# EAGLE board MurataBLE_P (EAGLE 7.5.0)
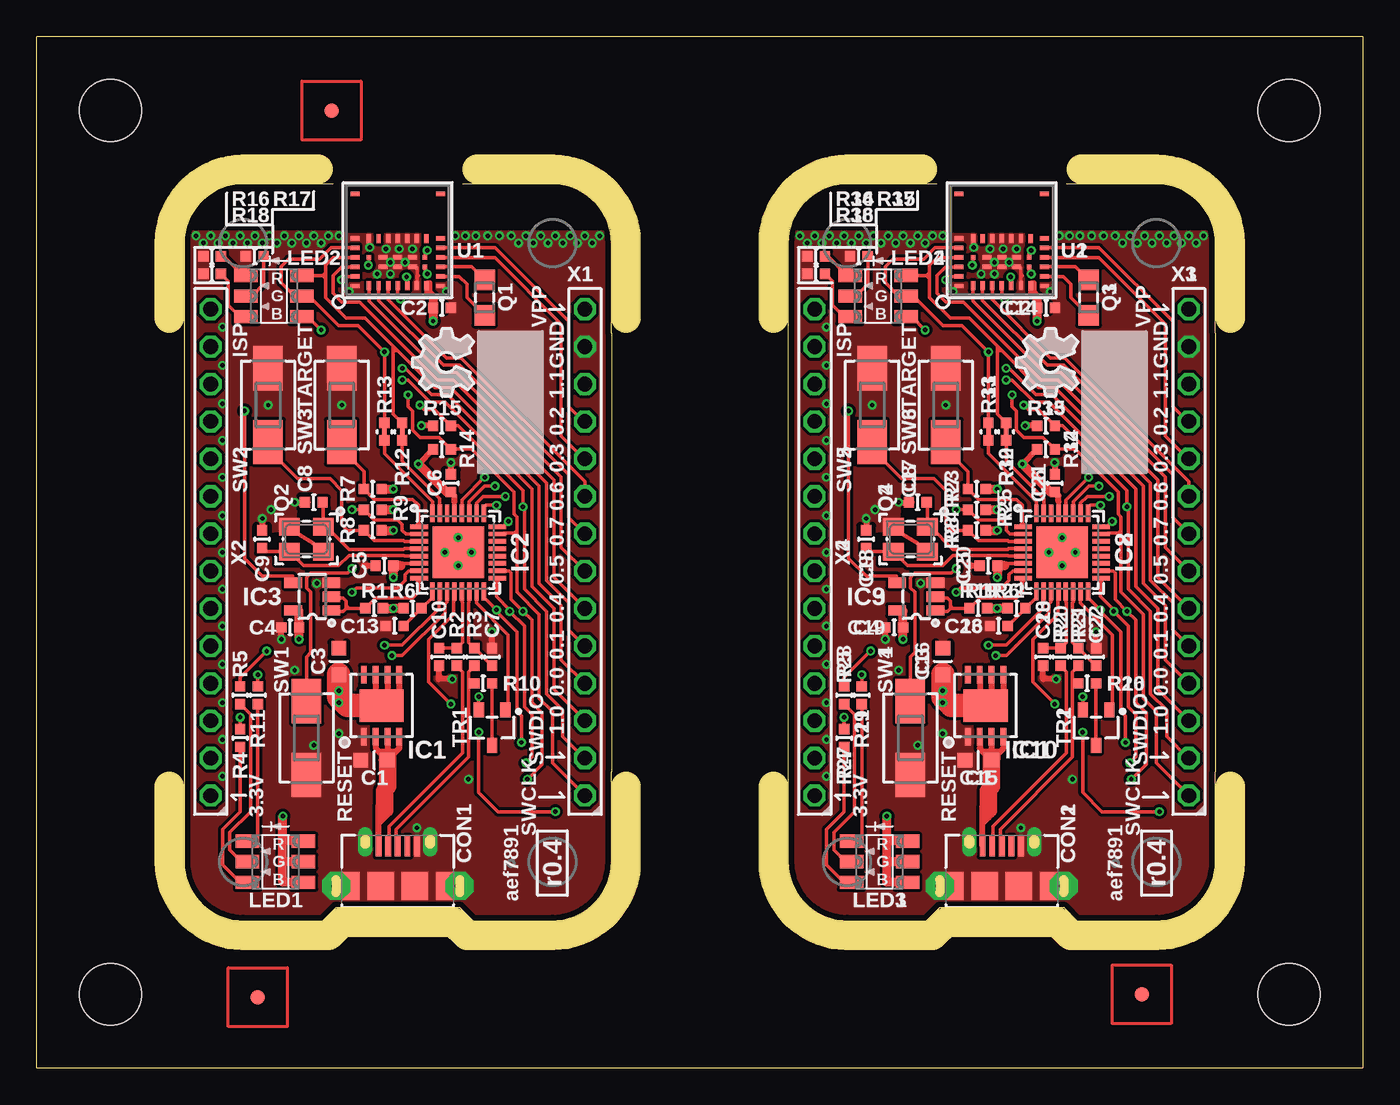
[diagram p0: board, top side]
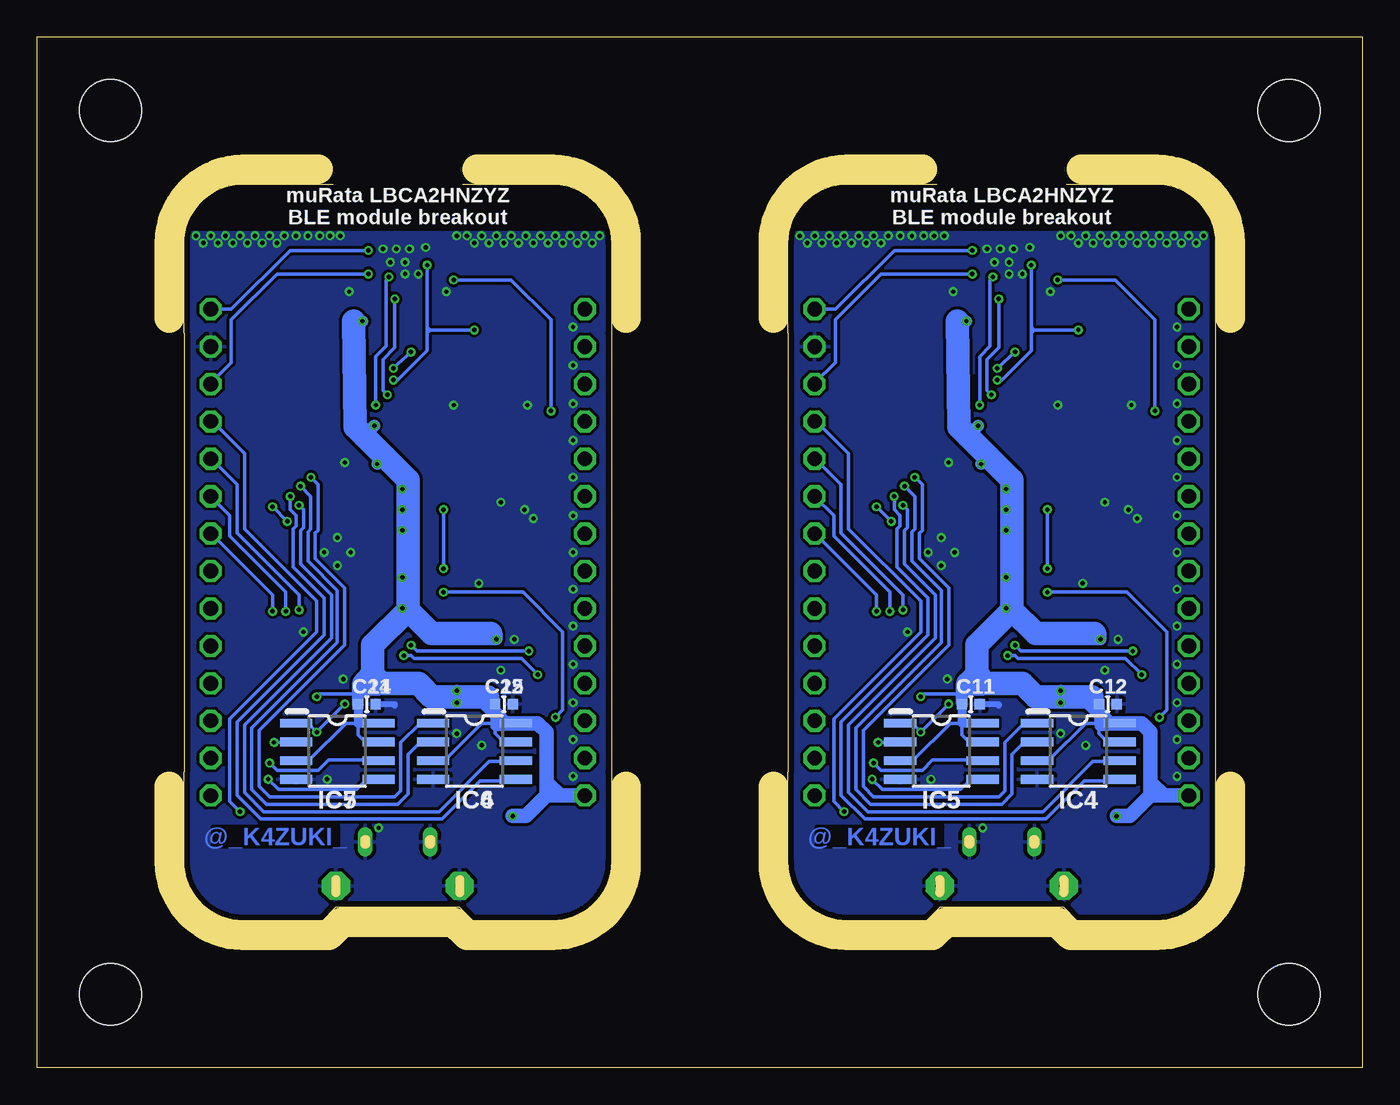
[diagram p1: board, bottom side, seen from below]

Size 90 x 70 mm. Coordinates in mm from the lower left corner, seen from the top.
Outline: 10,49.9 10,20.1
Outline: 39,49.9 39,20.1
Outline: 19.4,10 20.3,10.9 28.7,10.9 29.6,10
Outline: 51,49.9 51,20.1
Outline: 80,49.9 80,20.1
Outline: 60.4,10 61.3,10.9 69.7,10.9 70.6,10
Outline: 0,0 0,70 90,70 90,0 0,0
Copper layers (1*16): Top 0.035mm / dielectric 1.5mm / Bottom 0.035mm
Design rules "default *": minimum track width 0.15mm, minimum drill 0.3mm, track to track 0.15mm, track to pad 0.15mm, pad to pad 0.15mm, via to via 0.15mm, smd to smd 0mil, copper to edge 0.4mm, drill to drill 0.15mm, minimum pad ring 0.15mm, minimum via ring 0.15mm, stop-mask expansion 0.05mm, vias tented up to drill 100mil, thermal gap 10mil
Net classes: 0 default: clearance 0.15 mm
Holes 4.2 mm at 5,65 5,5 85,5 85,65
tRestrict: area 10,57.1 to 21.2,60; area 28.2,57.1 to 39,60; area 16.2,34.2 to 20.4,37.6; area 51,57.1 to 62.2,60; area 69.2,57.1 to 80,60; area 57.2,34.2 to 61.4,37.6; 48 lines
bRestrict: area 10,57.1 to 39,60; area 51,57.1 to 80,60
Milling: 10 lines

## Footprints (pad centres in the part's own frame; a part is rotated, then mirrored left to right if it is on the bottom)
CR_1608 = smd 1 x 1: 1 -0.9,0; 2 0.9,0
C0402 = smd 0.7 x 0.7: 1 -0.6,0; 2 0.6,0
CON_USB_47589-0001MOLEX = smd 0.4 x 1.4: 1 -1.3,4.15; 2 -0.65,4.15; 3 0,4.15; 4 0.65,4.15; 5 1.3,4.15 | drill 0.6 pad 1 long: SHD -2.2,4.45; SHD$1 2.2,4.45 | drill 0.6 pad 1.9 octagon: SHD$2 -4.2,1.45; SHD$3 4.2,1.45 | smd 1.6 x 1.9: SHD$4 -3.4,1.45; SHD$7 3.4,1.45 | smd 1.8 x 1.9: SHD$5 -1.15,1.45; SHD$6 1.15,1.45
DFN80P410X410_8N = smd 0.4 x 1.2: 1 -1.2,-2.1; 2 -0.4,-2.1; 3 0.4,-2.1; 4 1.2,-2.1; 5 1.2,2.1; 6 0.4,2.1; 7 -0.4,2.1; 8 -1.2,2.1 | smd 3 x 2.2: EP 0,0
HVQFN33 = smd 1.2 x 0.3: 1 -2.65,1.75; 2 -2.65,1.25; 3 -2.65,0.75; 4 -2.65,0.25; 5 -2.65,-0.25; 6 -2.65,-0.75; 7 -2.65,-1.25; 8 -2.65,-1.75; 17 2.65,-1.75; 18 2.65,-1.25; 19 2.65,-0.75; 20 2.65,-0.25; 21 2.65,0.25; 22 2.65,0.75; 23 2.65,1.25; 24 2.65,1.75 | smd 0.3 x 1.2: 9 -1.75,-2.65; 10 -1.25,-2.65; 11 -0.75,-2.65; 12 -0.25,-2.65; 13 0.25,-2.65; 14 0.75,-2.65; 15 1.25,-2.65; 16 1.75,-2.65; 25 1.75,2.65; 26 1.25,2.65; 27 0.75,2.65; 28 0.25,2.65; 29 -0.25,2.65; 30 -0.75,2.65; 31 -1.25,2.65; 32 -1.75,2.65 | smd 3.5 x 3.5: EXP 0,0
SOT95P280X145-5N = smd 1.2 x 0.7: 1 -1.3,0.95; 2 -1.3,0; 3 -1.3,-0.95; 4 1.3,-0.95; 5 1.3,0.95
IC_08_1.27_150MIL = smd 0.6 x 2.2: 1 -1.905,-2.8; 2 -0.635,-2.8; 3 0.635,-2.8; 4 1.905,-2.8; 5 1.905,2.8; 6 0.635,2.8; 7 -0.635,2.8 | smd 0.603 x 2.2: 8 -1.905,2.8
LED_3SEG_SMD = smd 1.6 x 0.9: 1 -1.9,1.4; 2 -1.9,0; 3 -1.9,-1.4; 4 1.9,1.4; 5 1.9,0; 6 1.9,-1.4
CR_2125 = smd 1.4 x 1.4: 1 -1.2,0; 2 1.2,0
CLOCK_3225 = smd 1.4 x 1.2: 1 -1.15,-0.85; 2 1.15,-0.85; 3 1.15,0.85; 4 -1.15,0.85
R0402SHORT = smd 0.7 x 0.7: 1 -0.6,0; 3 0.6,0 | smd 0.8 x 0.3: 2 0,0
SW_TACTSW_FSM2JMTR = smd 3 x 2: 1 -2.5,0; 2 2.5,0
FIDUCIAL = smd 1 x 1: TP 0,0
SOT95P300X140-3N = smd 0.7 x 1: 1 -0.9,-1.2; 2 0.9,-1.2; 3 0,1.2
IC_MURATA_LBCA2HNZYZ-711 = smd 0.3 x 0.6: 1 1.55,0.6; 2 2.2,0.6; 3 2.85,0.6; 4 3.5,0.6; 5 4.15,0.6; 6 4.8,0.6; 7 5.45,0.6; 14 5.45,3.8; 15 4.8,3.8; 16 4.15,3.8; 17 3.5,3.8; 18 2.85,3.8; 19 2.2,3.8; 20 1.55,3.8 | smd 0.6 x 0.3: 8 6.4,0.575; 9 6.4,1.225; 10 6.4,1.875; 11 6.4,2.525; 12 6.4,3.175; 13 6.4,3.825; 21 0.6,3.825; 22 0.6,3.175; 23 0.6,2.525; 24 0.6,1.875; 25 0.6,1.225; 26 0.6,0.575; 27 2.5,1.875; 28 3.5,1.875; 29 4.5,1.875; 32 4.5,2.525; 33 3.5,2.525; 34 2.5,2.525; 36 6.4,6.825; 37 0.6,6.825 | smd 0.3 x 0.3: 30 5.35,1.875; 31 5.35,2.525; 35 1.55,2.525
TSW-114-07-F-S = drill 1 pad 1.5 octagon: 1 16.51,0; 2 13.97,0; 3 11.43,0; 4 8.89,0; 5 6.35,0; 6 3.81,0; 7 1.27,0; 8 -1.27,0; 9 -3.81,0; 10 -6.35,0; 11 -8.89,0; 12 -11.43,0; 13 -13.97,0; 14 -16.51,0

## Placement (x,y rotation side)
C1  1u/1608  [CR_1608]  22.9,20.9 180 top
C2  0.1u/1005  [C0402]  27.5,51.6 0 top
C3  1u/1608  [CR_1608]  20.5,27.6 90 top
C4  0.1u/1005  [C0402]  17.2,29.9 180 top
C5  0.1u/1005  [C0402]  23.6,34.1 180 top
C6  0.1u/1005  [C0402]  28.1,39.7 90 top
C7  18p/1005  [C0402]  30.9,27.9 90 top
C8  18p/1005  [C0402]  18.8,38.4 180 top
C9  18p/1005  [C0402]  15.3,35.9 90 top
C10  18p/1005  [C0402]  27.3,27.9 270 top
C11  0.1u/1005  [C0402]  26.6,24.7 0 bottom
C12  0.1u/1005  [C0402]  17.3,24.7 0 bottom
C13  0.1u/1005  [C0402]  24.3,30 180 top
C14  0.1u/1005  [C0402]  68.5,51.6 0 top
C15  1u/1608  [CR_1608]  63.9,20.9 180 top
C16  1u/1608  [CR_1608]  61.5,27.6 90 top
C17  18p/1005  [C0402]  59.8,38.4 180 top
C18  18p/1005  [C0402]  56.3,35.9 90 top
C19  0.1u/1005  [C0402]  58.2,29.9 180 top
C20  0.1u/1005  [C0402]  64.6,34.1 180 top
C21  0.1u/1005  [C0402]  69.1,39.7 90 top
C22  18p/1005  [C0402]  71.9,27.9 90 top
C23  18p/1005  [C0402]  68.3,27.9 270 top
C24  0.1u/1005  [C0402]  67.6,24.7 0 bottom
C25  0.1u/1005  [C0402]  58.3,24.7 0 bottom
C26  0.1u/1005  [C0402]  65.3,30 180 top
CON1  47589-0001  [CON_USB_47589-0001MOLEX]  24.5,10.9 0 top
CON2  47589-0001  [CON_USB_47589-0001MOLEX]  65.5,10.9 0 top
GIT1  aef7891  [GIT-REVISION]  32.2,13.9 90 top
GIT2  aef7891  [GIT-REVISION]  73.2,13.9 90 top
IC1  [DFN80P410X410_8N]  23.4,24.6 0 top
IC2  LPC11U35_QFN33  [HVQFN33]  28.6,35 0 top
IC3  NC7SZ00  [SOT95P280X145-5N]  18.7,32 180 top
IC4  AT25DN512C  [IC_08_1.27_150MIL]  19.3,21.5 270 bottom
IC5  AT25XE011  [IC_08_1.27_150MIL]  28.6,21.5 270 bottom
IC6  AT25DN512C  [IC_08_1.27_150MIL]  60.3,21.5 270 bottom
IC7  AT25XE011  [IC_08_1.27_150MIL]  69.6,21.5 270 bottom
IC8  LPC11U35_QFN33  [HVQFN33]  69.6,35 0 top
IC9  NC7SZ00  [SOT95P280X145-5N]  59.7,32 180 top
IC10  [DFN80P410X410_8N]  64.4,24.6 0 top
ICON1  r0.4  [ICON_REVISION1.2]  35,14 90 top
ICON2  NC  [ICON_OSHW]  27.8,47.9 90 top
ICON3  r0.4  [ICON_REVISION1.2]  76,14 90 top
ICON4  NC  [ICON_OSHW]  68.8,47.9 90 top
LED1  LED_3SEG  [LED_3SEG_SMD]  16.2,14 0 top
LED2  LED_3SEG  [LED_3SEG_SMD]  16.1,52.4 0 top
LED3  LED_3SEG  [LED_3SEG_SMD]  57.2,14 0 top
LED4  LED_3SEG  [LED_3SEG_SMD]  57.1,52.4 0 top
P1  NC  [PCB_CORNER_NH]  35,14 0 top
P2  NC  [PCB_CORNER_NH]  35,56 90 top
P3  NC  [PCB_CORNER_NH]  14,56 180 top
P4  NC  [PCB_CORNER_NH]  14,14 270 top
P5  NC  [PCB_CORNER_NH]  76,14 0 top
P6  NC  [PCB_CORNER_NH]  76,56 90 top
P7  NC  [PCB_CORNER_NH]  55,56 180 top
P8  NC  [PCB_CORNER_NH]  55,14 270 top
Q1  32.768K/2012  [CR_2125]  30.4,52.3 90 top
Q2  12M/3225  [CLOCK_3225]  18.3,35.9 180 top
Q3  32.768K/2012  [CR_2125]  71.4,52.3 90 top
Q4  12M/3225  [CLOCK_3225]  59.3,35.9 180 top
R1  10k/1005  [C0402]  22.9,31.2 180 top
R2  33/1005  [C0402]  28.5,27.9 90 top
R3  33/1005  [C0402]  29.7,27.9 90 top
R4  1k/1005  [C0402]  13.8,22.4 270 top
R5  1k/1005  [C0402]  13.8,25.3 270 top
R6  10k/1005  [C0402]  25.5,31.2 0 top
R7  10k/1005  [C0402]  22.8,39.3 180 top
R8  10k/1005  [C0402]  22.8,36.5 180 top
R9  10k/1005  [C0402]  22.8,37.9 180 top
R10  1.5k/1005  [C0402]  30.3,26.1 180 top
R11  1k/1005  [C0402]  15,25.3 270 top
R12  NC  [R0402SHORT]  24.8,43.2 90 top
R13  NC  [R0402SHORT]  23.6,43.2 90 top
R14  10k/1005  [C0402]  27.5,42 180 top
R15  10k/1005  [C0402]  27.5,43.6 180 top
R16  1k/1005  [C0402]  11.9,55.1 180 top
R17  1k/1005  [C0402]  14.8,55.1 180 top
R18  1k/1005  [C0402]  11.9,53.9 180 top
R19  10k/1005  [C0402]  63.9,31.2 180 top
R20  33/1005  [C0402]  69.5,27.9 90 top
R21  33/1005  [C0402]  70.7,27.9 90 top
R22  10k/1005  [C0402]  66.5,31.2 0 top
R23  10k/1005  [C0402]  63.8,39.3 180 top
R24  10k/1005  [C0402]  63.8,36.5 180 top
R25  10k/1005  [C0402]  63.8,37.9 180 top
R26  1.5k/1005  [C0402]  71.3,26.1 180 top
R27  1k/1005  [C0402]  54.8,22.4 270 top
R28  1k/1005  [C0402]  54.8,25.3 270 top
R29  1k/1005  [C0402]  56,25.3 270 top
R30  NC  [R0402SHORT]  65.8,43.2 90 top
R31  NC  [R0402SHORT]  64.6,43.2 90 top
R32  10k/1005  [C0402]  68.5,42 180 top
R33  10k/1005  [C0402]  68.5,43.6 180 top
R34  1k/1005  [C0402]  52.9,55.1 180 top
R35  1k/1005  [C0402]  55.8,55.1 180 top
R36  1k/1005  [C0402]  52.9,53.9 180 top
SW1  FSM2JMTR  [SW_TACTSW_FSM2JMTR]  18.3,22.4 90 top
SW2  FSM2JMTR  [SW_TACTSW_FSM2JMTR]  15.7,45 270 top
SW3  FSM2JMTR  [SW_TACTSW_FSM2JMTR]  20.7,45 270 top
SW4  FSM2JMTR  [SW_TACTSW_FSM2JMTR]  59.3,22.4 90 top
SW5  FSM2JMTR  [SW_TACTSW_FSM2JMTR]  56.7,45 270 top
SW6  FSM2JMTR  [SW_TACTSW_FSM2JMTR]  61.7,45 270 top
TP100  NC  [FIDUCIAL]  15,4.8 0 top
TP101  NC  [FIDUCIAL]  75,5 0 top
TP102  NC  [FIDUCIAL]  20,65 0 top
TR1  BSS84  [SOT95P300X140-3N]  30.9,23.1 180 top
TR2  BSS84  [SOT95P300X140-3N]  71.9,23.1 180 top
U1  LBCA2HNZYZ  [IC_MURATA_LBCA2HNZYZ-711]  21,52.5 0 top
U2  LBCA2HNZYZ  [IC_MURATA_LBCA2HNZYZ-711]  62,52.5 0 top
X1  TSW-114-02-S-S  [TSW-114-07-F-S]  37.2,35 270 top
X2  TSW-114-02-S-S  [TSW-114-07-F-S]  11.8,35 270 top
X3  TSW-114-02-S-S  [TSW-114-07-F-S]  78.2,35 270 top
X4  TSW-114-02-S-S  [TSW-114-07-F-S]  52.8,35 270 top

## Library data of the parts
C1 C3 C15 C16 = mylib; SEEED: 302010139
C2 C4-C6 C11-C14 C19-C21 C24-C26 = mylib; DIGIKEY: 490-3261-1-ND; SEEED: 302010024
C7-C10 C17 C18 C22 C23 = mylib; DIGIKEY: 490-5858-1-ND; SEEED: 302010016
CON1 CON2 = mylib; DIGIKEY: WM17143CT-ND
GIT1 GIT2 = git-revision; NOT_COMPONENT: YES
IC1 IC10 = mylib; DIGIKEY: 296-32364-1-ND
IC2 IC8 = mylib; DIGIKEY: 568-9586-ND; SEEED: 310010053
IC3 IC9 = mylib; DIGIKEY: NC7SZ00M5XCT-ND
IC4 IC6 = mylib; MOUSER: 988-A25DN512CSSHFGPT (cuttape)
IC5 IC7 = mylib; DIGIKEY: 1265-1137-1-ND
ICON1-ICON4 P1-P8 R12 R13 R30 R31 TP100-TP102 = mylib; NOT_COMPONENT: YES
LED1-LED4 = mylib; MOUSER: 604-APF3236SEEZGQBDC
Q1 Q3 = mylib; DIGIKEY: 1253-1342-1-ND
Q2 Q4 = mylib; DIGIKEY: 1253-1168-1-ND
R1 R6-R9 R14 R15 R19 R22-R25 R32 R33 = mylib; DIGIKEY: P10.0KLCT-ND; SEEED: 301010047
R2 R3 R20 R21 = mylib; DIGIKEY: P33.0LCT-ND; SEEED: 301010609
R4 R5 R11 R16-R18 R27-R29 R34-R36 = mylib; DIGIKEY: P1.00KLCT-ND; SEEED: 301010006
R10 R26 = mylib; DIGIKEY: P1.50KLCT-ND; SEEED: 301010001
SW1-SW6 = mylib; DIGIKEY: 450-2146-1-ND
TR1 TR2 = mylib; AKIZUKI: I-04269/I-04270(reel); DIGIKEY: BSS84CT-ND
U1 U2 = mylib; DIGIKEY: 490-10561-1-ND; MOUSER: 81-LBCA2HNZYZ-711
X1-X4 = mylib; AKIZUKI: C-04397; NOT_COMPONENT: YES

## Nets
3.3V: C2.1 C3.1 C4.1 C5.1 C6.1 C11.1 C12.1 IC1.5 IC1.6 IC1.7 IC1.EP IC2.6 IC2.29 IC3.5 IC4.3 IC4.7 IC4.8 IC5.3 IC5.7 IC5.8 LED1.4 LED1.5 LED1.6 R1.1 R6.1 R7.1 R8.1 R9.1 R14.2 R15.2 TR1.2 U1.7 X2.1
3.3V1: C14.1 C16.1 C19.1 C20.1 C21.1 C24.1 C25.1 IC6.3 IC6.7 IC6.8 IC7.3 IC7.7 IC7.8 IC8.6 IC8.29 IC9.5 IC10.5 IC10.6 IC10.7 IC10.EP LED3.4 LED3.5 LED3.6 R19.1 R22.1 R23.1 R24.1 R25.1 R32.2 R33.2 TR2.2 U2.7 X4.1
580.P0_0: LED2.4 R12.3 U1.23 X1.5
580.P0_1: LED2.5 R13.3 U1.22 X1.4
580.P0_2: IC2.12 IC5.1 U1.12 X1.11
580.P0_3: IC2.16 IC5.2 U1.11 X1.10
580.P0_4: U1.24 X1.6
580.P0_5: U1.1 X1.7
580.P0_6: IC2.17 IC5.6 U1.3 X1.9
580.P0_7: IC2.18 IC5.5 U1.2 X1.8
580.P0_8: U2.1 X3.7
580.P0_9: IC7.6 IC8.17 U2.3 X3.9
580.P0_10: IC7.5 IC8.18 U2.2 X3.8
580.P0_11: IC7.1 IC8.12 U2.12 X3.11
580.P0_12: IC7.2 IC8.16 U2.11 X3.10
580.P0_13: U2.24 X3.6
580.P0_14: LED4.4 R30.3 U2.23 X3.5
580.P0_15: LED4.5 R31.3 U2.22 X3.4
580.P1_0: LED2.6 U1.35 X1.3
580.P1_1: U1.30 X1.12
580.P1_2: LED4.6 U2.35 X3.3
580.P1_3: U2.30 X3.12
!RESET!: IC2.2 R9.2 SW1.2
!RESET!1: IC8.2 R25.2 SW4.2
FB_BL: IC2.1 R7.2 SW3.2
FB_BL1: IC8.1 R23.2 SW6.2
FB_ISP: IC2.3 R8.2 SW2.2
FB_ISP1: IC8.3 R24.2 SW5.2
GND: C1.2 C2.2 C3.2 C4.2 C5.2 C6.2 C7.2 C8.2 C9.2 C10.2 C11.2 C12.2 C13.2 CON1.5 CON1.SHD CON1.SHD$1 CON1.SHD$2 CON1.SHD$3 CON1.SHD$4 CON1.SHD$5 CON1.SHD$6 CON1.SHD$7 IC1.1 IC2.EXP IC3.3 IC4.4 IC5.4 Q2.2 Q2.4 R16.2 R17.2 R18.2 SW1.1 SW2.1 SW3.1 U1.6 U1.8 U1.15 U1.16 U1.17 U1.18 U1.20 U1.21 U1.26 U1.27 U1.28 U1.29 U1.32 U1.33 U1.34 X1.13
GND1: C14.2 C15.2 C16.2 C17.2 C18.2 C19.2 C20.2 C21.2 C22.2 C23.2 C24.2 C25.2 C26.2 CON2.5 CON2.SHD CON2.SHD$1 CON2.SHD$2 CON2.SHD$3 CON2.SHD$4 CON2.SHD$5 CON2.SHD$6 CON2.SHD$7 IC6.4 IC7.4 IC8.EXP IC9.3 IC10.1 Q4.2 Q4.4 R34.2 R35.2 R36.2 SW4.1 SW5.1 SW6.1 U2.6 U2.8 U2.15 U2.16 U2.17 U2.18 U2.20 U2.21 U2.26 U2.27 U2.28 U2.29 U2.32 U2.33 U2.34 X3.13
N$2: Q1.1 U1.9
N$3: Q1.2 U1.10
N$4: C13.1 IC2.9 R6.2
N$5: Q3.1 U2.9
N$6: R10.1 TR1.3
N$7: IC2.15 TR1.1
N$8: IC2.7 R4.1
N$9: IC2.10 R5.1
N$10: IC2.11 R11.1
N$11: LED1.1 R11.2
N$12: LED1.2 R5.2
N$13: LED1.3 R4.2
N$14: LED2.3 R18.1
N$15: LED2.2 R17.1
N$16: LED2.1 R16.1
N$17: Q3.2 U2.10
N$18: C8.1 IC2.4 Q2.1
N$19: C9.1 IC2.5 Q2.3
N$20: C7.1 IC2.14 R3.2
N$21: CON1.3 R3.1 R10.2
N$22: CON1.2 R2.1
N$23: C17.1 IC8.4 Q4.1
N$24: C10.1 IC2.13 R2.2
N$25: C18.1 IC8.5 Q4.3
N$26: CON2.3 R21.1 R26.2
N$27: CON2.2 R20.1
N$28: C22.1 IC8.14 R21.2
N$29: C23.1 IC8.13 R20.2
N$30: C26.1 IC8.9 R22.2
N$31: R26.1 TR2.3
N$32: IC8.15 TR2.1
N$33: IC8.7 R27.1
N$34: IC8.10 R28.1
N$35: IC8.11 R29.1
N$36: LED3.2 R28.2
N$37: LED3.1 R29.2
N$38: LED3.3 R27.2
N$39: LED4.3 R36.1
N$40: LED4.2 R35.1
N$41: LED4.1 R34.1
NSRST: IC2.8 IC3.1 IC3.2 R1.2
NSRST1: IC8.8 IC9.1 IC9.2 R19.2
P0_1: IC6.2 IC8.27
P0_2: IC6.5 IC8.26
P0_3: IC6.6 IC8.25
P0_15: IC2.25 IC4.6
P0_16: IC2.26 IC4.5
P0_32: IC2.27 IC4.2
P1_1: IC6.1 IC8.28
P1_15: IC2.28 IC4.1
RESET: IC3.4 U1.25
RESET1: IC9.4 U2.25
SWCLK: IC2.23 R14.1 U1.4 X1.1
SWCLK1: IC8.23 R32.1 U2.4 X3.1
SWDIO: IC2.24 R15.1 U1.5 X1.2
SWDIO1: IC8.24 R33.1 U2.5 X3.2
TGT_RX: IC2.32 R13.1 R13.2
TGT_RX1: IC8.32 R31.1 R31.2
TGT_TX: IC2.31 R12.1 R12.2
TGT_TX1: IC8.31 R30.1 R30.2
VPP: U1.31 X1.14
VPP2: U2.31 X3.14
VUSB: C1.1 CON1.1 IC1.2 IC1.3 IC1.4
VUSB1: C15.1 CON2.1 IC10.2 IC10.3 IC10.4

## Tracks (layer width: path | path; a pad name or v marks a point on that pad's centre or on a via)
3.3V  (via drill 0.3)
  Top 0.25: IC2.6 24.85,34.25 24.8,34.2 | IC2.29 28.35,38.45 | TR1.2 v30,25.2 | IC3.5 17.75,31.05 17.8,31
  Top 0.3: U1.7 26.45,52.6 26.6,52.6 | 26.6,52.6 26.6,53.3 | 26.6,53.3 26.5,53.3 | 26.6,52.6 26.7,52.6 26.7,53.3 26.6,53.3
  Top 0.4: 24.8,34.2 24.7,34.1 | 28.35,38.45 28.35,38.85 C6.1 | v25.9,41 R14.2 | R15.2 v26.1,43.6 | IC1.7 23,25 IC1.EP 23.8,25 | IC1.6 23.8,25 | IC1.5 24.6,25 23.8,25
  Top 0.6: 26.6,52.6 26.9,52.3 C2.1 v26.9,50.7 | v24.2,33.3 C5.1 24.7,34.1 | v17.8,29.1 C4.1 17.8,31 | C6.1 27.8,39.1 v25.9,41 | R8.1 v24.2,36.5 | R9.1 v24.2,37.9 | R7.1 v24.2,39.3 | R6.1 v24.2,31.2 R1.1 | LED1.6 16.7,12.6 16.7,14 | 16.7,14 16.7,15.4 | 16.7,15.4 v16.7,17.1 | LED1.4 16.7,15.4 | LED1.5 16.7,14
  Top 0.8: v20.5,24.8 20.5,25.2 v20.5,25.6
  Top 1.6: IC1.EP 21.1,24.6 20.5,25.2 | v20.5,25.6 C3.1
  Bottom 0.25: IC5.3 31.4,20.9 30.5,20.9 28,23.4 27.2,23.4 27.2,22.6 26.8,22.2 25.8,22.2 IC5.7 | IC4.7 16.54,22.14 16.6,22.2 17.4,22.2 17.9,22.7 17.9,23.2 | IC4.3 22.1,20.9 21.3,20.9 18.8,23.4 17.9,23.4 | v30,25.2 29.8,25.4 27.2,25.4
  Bottom 0.6: IC5.8 27.2,23.4 C11.1 | IC4.8 | 17.9,23.4 17.9,24.1 C12.1 | C12.1 18.5,24.7 | C12.1 17.9,25.2 18.4,25.2 | 17.7,23.4 17.9,23.4 | 17.9,23.4 17.9,23.2 17.4,23.2
  Bottom 0.8: 23.8,31.2 v24.2,31.2 24.2,30.8 | v24.2,33.3 23.8,33.3 | v24.2,36.5 23.8,36.5 | v24.2,39.3 23.8,39.3 | 23.8,37.9 v24.2,37.9 | 27.5,50.7 v26.9,50.7 | C11.1 27.2,25.4 27.2,25.7 | v25.9,41 25.4,41.5 | v26.1,43.6 26.8,42.9 | 27.2,25.7 26.8,26.1 | 27.2,25.7 27.2,26.1 | 27.2,25.7 25.7,25.7 | v20.5,24.8 20.5,25.2 v20.5,25.6 | 17.8,29.5 18.2,29.5 18.2,29.1 v17.8,29.1 17.8,29.5
  Bottom 1: IC4.8 17.2,23.4 | v16.7,17.1 15.8,17.1 14.4,18.5 | 14.4,18.5 14.4,19.4 | 14.4,19.4 14.4,22.8 15.01,23.41 IC4.8 | 17.2,23.4 17.9,24.1 18.5,24.7 18.7,24.9 | 17.2,23.4 17.7,23.4 | X2.1 13.5,18.5 | 13.5,18.5 14.4,18.5 | 14.4,19.4 13.5,18.5
  Bottom 1.6: 23.8,31.1 22.2,29.5 18.2,29.5 | 23.8,31.1 23.8,31.2 23.8,33.3 23.8,36.5 23.8,37.9 23.8,39.3 23.8,39.9 25.4,41.5 26.8,42.9 27.4,43.5 27.5,50.7 | 23.8,31.1 26.2,28.7 26.2,26.7 | 26.2,26.7 26.8,26.1 25.6,26.1 | 26.2,26.7 25.6,26.1 | 25.6,26.1 23.1,26.1 22.2,25.2 20.5,25.2 18.4,25.2
3.3V1  (via drill 0.3)
  Top 0.25: IC8.6 65.85,34.25 65.8,34.2 | IC8.29 69.35,38.45 | TR2.2 v71,25.2 | IC9.5 58.75,31.05 58.8,31
  Top 0.3: U2.7 67.45,52.6 67.6,52.6 | 67.6,52.6 67.6,53.3 | 67.6,53.3 67.5,53.3 | 67.6,52.6 67.7,52.6 67.7,53.3 67.6,53.3
  Top 0.4: 65.8,34.2 65.7,34.1 | 69.35,38.45 69.35,38.85 C21.1 | v66.9,41 R32.2 | R33.2 v67.1,43.6 | IC10.7 64,25 IC10.EP 64.8,25 | IC10.6 64.8,25 | IC10.5 65.6,25 64.8,25
  Top 0.6: 67.6,52.6 67.9,52.3 C14.1 v67.9,50.7 | v65.2,33.3 C20.1 65.7,34.1 | v58.8,29.1 C19.1 58.8,31 | C21.1 68.8,39.1 v66.9,41 | R24.1 v65.2,36.5 | R25.1 v65.2,37.9 | R23.1 v65.2,39.3 | R22.1 v65.2,31.2 R19.1 | LED3.6 57.7,12.6 57.7,14 | 57.7,14 57.7,15.4 | 57.7,15.4 v57.7,17.1 | LED3.4 57.7,15.4 | LED3.5 57.7,14
  Top 0.8: v61.5,24.8 61.5,25.2 v61.5,25.6
  Top 1.6: IC10.EP 62.1,24.6 61.5,25.2 | v61.5,25.6 C16.1
  Bottom 0.25: IC7.3 72.4,20.9 71.5,20.9 69,23.4 68.2,23.4 68.2,22.6 67.8,22.2 66.8,22.2 IC7.7 | IC6.7 57.53,22.14 57.6,22.2 58.4,22.2 58.9,22.7 58.9,23.2 | IC6.3 63.1,20.9 62.3,20.9 59.8,23.4 58.9,23.4 | v71,25.2 70.8,25.4 68.2,25.4
  Bottom 0.6: IC7.8 68.2,23.4 C24.1 | IC6.8 | 58.9,23.4 58.9,24.1 C25.1 | C25.1 59.5,24.7 | C25.1 58.9,25.2 59.4,25.2 | 58.7,23.4 58.9,23.4 | 58.9,23.4 58.9,23.2 58.4,23.2
  Bottom 0.8: 64.8,31.2 v65.2,31.2 65.2,30.8 | v65.2,33.3 64.8,33.3 | v65.2,36.5 64.8,36.5 | v65.2,39.3 64.8,39.3 | 64.8,37.9 v65.2,37.9 | 68.5,50.7 v67.9,50.7 | C24.1 68.2,25.4 68.2,25.7 | v66.9,41 66.4,41.5 | v67.1,43.6 67.8,42.9 | 68.2,25.7 67.8,26.1 | 68.2,25.7 68.2,26.1 | 68.2,25.7 66.7,25.7 | v61.5,24.8 61.5,25.2 v61.5,25.6 | 58.8,29.5 59.2,29.5 59.2,29.1 v58.8,29.1 58.8,29.5
  Bottom 1: IC6.8 58.2,23.4 | v57.7,17.1 56.8,17.1 55.4,18.5 | 55.4,18.5 55.4,19.4 | 55.4,19.4 55.4,22.8 56.01,23.41 IC6.8 | 58.2,23.4 58.9,24.1 59.5,24.7 59.7,24.9 | 58.2,23.4 58.7,23.4 | X4.1 54.5,18.5 | 54.5,18.5 55.4,18.5 | 55.4,19.4 54.5,18.5
  Bottom 1.6: 64.8,31.1 63.2,29.5 59.2,29.5 | 64.8,31.1 64.8,31.2 64.8,33.3 64.8,36.5 64.8,37.9 64.8,39.3 64.8,39.9 66.4,41.5 67.8,42.9 68.4,43.5 68.5,50.7 | 64.8,31.1 67.2,28.7 67.2,26.7 | 67.2,26.7 67.8,26.1 66.6,26.1 | 67.2,26.7 66.6,26.1 | 66.6,26.1 64.1,26.1 63.2,25.2 61.5,25.2 59.4,25.2
580.P0_0
  Top 0.25: 19.6,53.6 19.6,52.3 21,50.9 22.3,50.9 24.2,49 | 24.2,48.7 24.2,49 | 24.5,48.7 24.2,49 | 24.2,48.7 24.3,48.7 | 24.3,48.7 24.5,48.7 | 24.5,48.7 27,46.2 28.1,46.2 34.6,39.7 34.6,33.1 36.1,31.6 36.1,29.75 X1.5 | U1.23 20.12,55.02 19.6,54.5 19.6,54 | 24.2,48.6 24.2,44.4 R12.3 | 24.2,48.6 24.2,48.7 | 24.2,48.6 24.3,48.7 | LED2.4 19.4,53.8 | 19.4,53.8 19.6,53.6 | 19.4,53.8 19.6,54 | 19.6,54 19.6,53.6
580.P0_1  (via drill 0.3)
  Top 0.25: v24.8,47.5 25,47.5 26.8,45.7 27.9,45.7 34.1,39.5 34.1,32.9 35.6,31.4 35.6,27.71 X1.4 | U1.22 19.98,55.67 19.2,54.9 17.1,54.9 16.6,54.4 16.6,53.3 17.5,52.4 LED2.5 18.5,52.4 20.5,50.4 21.8,50.4 v23.6,48.6 R13.3
  Bottom 0.25: v23.6,48.6 v24.8,47.5
580.P0_2  (via drill 0.3)
  Top 0.25: U1.12 27.48,55.67 27.5,55.7 31.1,55.7 36.1,50.7 36.1,44.9 37.11,43.89 X1.11 | IC2.12 28.35,31.75 28.3,31.7 28.3,30.8 26.6,29.1 26.6,26.2 v28.1,24.7 | v35.2,17.4 31.3,17.4 30,18.7 v30,22.8
  Bottom 0.25: IC5.1 30.6,23.4 v30,22.8 v28.1,24.7 | v35.2,17.4 35.9,18.1 35.9,23.7 30,29.6 30,31.7 34.9,36.6 34.9,41.7 37.1,43.9 X1.11
580.P0_3  (via drill 0.3)
  Top 0.25: X1.10 37.15,41.35 35.6,42.9 35.6,50.5 31.1,55 27.5,55 27.48,55.02 U1.11 | IC2.16 30.35,31.95 v31.2,31.1 31.2,31 32.6,29.6 32.6,24.2 32.9,23.9 v32.9,22.1
  Bottom 0.25: IC5.2 31.46,22.14 31.5,22.1 v32.9,22.1 | X1.10 37.2,41.4 35.4,39.6 35.4,36.3 31.2,32.1 v31.2,31.1
580.P0_4
  Top 0.25: X1.6 35.1,33.29 35.1,39.9 28.3,46.7 27.2,46.7 21.9,52 20.7,52 20.1,52.6 20.1,53.8 20.68,54.38 U1.24
580.P0_5
  Top 0.25: U1.1 22.55,52.05 27.4,47.2 28.5,47.2 35.6,40.1 35.6,35.33 X1.7
580.P0_6  (via drill 0.3)
  Top 0.25: U1.3 23.85,52.15 27.8,48.2 28.8,48.2 37.2,39.8 X1.9 | IC2.17 31.2,33.2 31.2,33 | 31.2,33 31.2,32 32.1,31.1 v32.1,31 33.1,30 33.1,24.5 33.6,24 33.6,21.1 v33.2,20.7 | 31.2,33 31,33.2 | 31.2,33 31.4,33.2
  Bottom 0.25: IC5.6 25.8,20.9 29.2,20.9 29.9,20.2 32.7,20.2 v33.2,20.7 | X1.9 35.9,37.5 35.9,36.1 32.1,32.3 v32.1,31
580.P0_7  (via drill 0.3)
  Top 0.25: U1.2 23.2,52.1 27.6,47.7 28.7,47.7 36.1,40.3 36.1,37.37 X1.8 | IC2.18 32.05,33.75 32.2,33.6 32.2,31.8 v33,31 33.6,30.4 33.6,24.8 34.3,24.1 34.3,20.6 v33.3,19.6
  Bottom 0.25: v33.3,19.6 32.6,18.9 27.3,18.9 26.6,19.6 25.9,19.6 25.89,19.59 IC5.5 | X1.8 37.13,36.2 37.1,36.2 33,32.1 v33,31
580.P0_8
  Top 0.25: U2.1 63.55,52.05 68.4,47.2 69.5,47.2 76.6,40.1 76.6,35.33 X3.7
580.P0_9  (via drill 0.3)
  Top 0.25: U2.3 64.85,52.15 68.8,48.2 69.8,48.2 78.2,39.8 X3.9 | IC8.17 72.2,33.2 72.2,33 | 72.2,33 72.2,32 73.1,31.1 v73.1,31 74.1,30 74.1,24.5 74.6,24 74.6,21.1 v74.2,20.7 | 72.2,33 72,33.2 | 72.2,33 72.4,33.2
  Bottom 0.25: IC7.6 66.8,20.9 70.2,20.9 70.9,20.2 73.7,20.2 v74.2,20.7 | X3.9 76.9,37.5 76.9,36.1 73.1,32.3 v73.1,31
580.P0_10  (via drill 0.3)
  Top 0.25: U2.2 64.2,52.1 68.6,47.7 69.7,47.7 77.1,40.3 77.1,37.37 X3.8 | IC8.18 73.05,33.75 73.2,33.6 73.2,31.8 v74,31 74.6,30.4 74.6,24.8 75.3,24.1 75.3,20.6 v74.3,19.6
  Bottom 0.25: v74.3,19.6 73.6,18.9 68.3,18.9 67.6,19.6 66.9,19.6 66.89,19.59 IC7.5 | X3.8 78.13,36.2 78.1,36.2 74,32.1 v74,31
580.P0_11  (via drill 0.3)
  Top 0.25: U2.12 68.47,55.67 68.5,55.7 72.1,55.7 77.1,50.7 77.1,44.9 78.11,43.89 X3.11 | IC8.12 69.35,31.75 69.3,31.7 69.3,30.8 67.6,29.1 67.6,26.2 v69.1,24.7 | v76.2,17.4 72.3,17.4 71,18.7 v71,22.8
  Bottom 0.25: IC7.1 71.6,23.4 v71,22.8 v69.1,24.7 | v76.2,17.4 76.9,18.1 76.9,23.7 71,29.6 71,31.7 75.9,36.6 75.9,41.7 78.1,43.9 X3.11
580.P0_12  (via drill 0.3)
  Top 0.25: X3.10 78.15,41.35 76.6,42.9 76.6,50.5 72.1,55 68.5,55 68.47,55.02 U2.11 | IC8.16 71.35,31.95 v72.2,31.1 72.2,31 73.6,29.6 73.6,24.2 73.9,23.9 v73.9,22.1
  Bottom 0.25: IC7.2 72.47,22.14 72.5,22.1 v73.9,22.1 | X3.10 78.2,41.4 76.4,39.6 76.4,36.3 72.2,32.1 v72.2,31.1
580.P0_13
  Top 0.25: X3.6 76.1,33.29 76.1,39.9 69.3,46.7 68.2,46.7 62.9,52 61.7,52 61.1,52.6 61.1,53.8 61.67,54.38 U2.24
580.P0_14
  Top 0.25: 60.6,53.6 60.6,52.3 62,50.9 63.3,50.9 65.2,49 | 65.2,48.7 65.2,49 | 65.5,48.7 65.2,49 | 65.2,48.7 65.3,48.7 | 65.3,48.7 65.5,48.7 | 65.5,48.7 68,46.2 69.1,46.2 75.6,39.7 75.6,33.1 77.1,31.6 77.1,29.75 X3.5 | U2.23 61.12,55.02 60.6,54.5 60.6,54 | 65.2,48.6 65.2,44.4 R30.3 | 65.2,48.6 65.2,48.7 | 65.2,48.6 65.3,48.7 | LED4.4 60.4,53.8 | 60.4,53.8 60.6,53.6 | 60.4,53.8 60.6,54 | 60.6,54 60.6,53.6
580.P0_15  (via drill 0.3)
  Top 0.25: v65.8,47.5 66,47.5 67.8,45.7 68.9,45.7 75.1,39.5 75.1,32.9 76.6,31.4 76.6,27.71 X3.4 | U2.22 60.98,55.67 60.2,54.9 58.1,54.9 57.6,54.4 57.6,53.3 58.5,52.4 LED4.5 59.5,52.4 61.5,50.4 62.8,50.4 v64.6,48.6 R31.3
  Bottom 0.25: v64.6,48.6 v65.8,47.5
580.P1_0  (via drill 0.3)
  Top 0.25: U1.35 22.55,54.55 v22.5,54.5 | v24.8,46.7 25.2,46.7 26.7,45.2 27.7,45.2 33.6,39.3 33.6,32.7 35.1,31.2 35.1,25.7 37.2,23.6 X1.3 | LED2.6 18.4,51 v19.3,50.1
  Bottom 0.25: v22.5,54.5 22.5,50.3 | 22.5,50.3 22.5,49.9 | 22.5,49.9 22.5,48.7 24.5,46.7 v24.8,46.7 | v19.3,50.1 22.3,50.1 | 22.3,50.1 22.5,49.9 | 22.3,50.1 22.5,50.3
580.P1_1  (via drill 0.3)
  Top 0.25: U1.30 26.35,54.05 v26.5,53.9
  Bottom 0.25: X1.12 37.2,46.5 35.8,47.9 35.8,50.8 32.7,53.9 v26.5,53.9
580.P1_2  (via drill 0.3)
  Top 0.25: U2.35 63.55,54.55 v63.5,54.5 | v65.8,46.7 66.2,46.7 67.7,45.2 68.7,45.2 74.6,39.3 74.6,32.7 76.1,31.2 76.1,25.7 78.2,23.6 X3.3 | LED4.6 59.4,51 v60.3,50.1
  Bottom 0.25: v63.5,54.5 63.5,50.3 | 63.5,50.3 63.5,49.9 | 63.5,49.9 63.5,48.7 65.5,46.7 v65.8,46.7 | v60.3,50.1 63.3,50.1 | 63.3,50.1 63.5,49.9 | 63.3,50.1 63.5,50.3
580.P1_3  (via drill 0.3)
  Top 0.25: U2.30 67.35,54.05 v67.5,53.9
  Bottom 0.25: X3.12 78.2,46.5 76.8,47.9 76.8,50.8 73.7,53.9 v67.5,53.9
!RESET!  (via drill 0.3)
  Top 0.25: IC2.2 25.05,36.25 24.8,36.5 24.8,36.9 24.5,37.2 22.9,37.2 R9.2 v21.4,37.9 | SW1.2 18.3,27.9 18.6,28.2 18.6,32.3 18.3,32.6 18.3,33.3 18.6,33.6 21.1,33.6 v21.4,33.9
  Bottom 0.25: v21.4,37.9 v21.4,33.9
!RESET!1  (via drill 0.3)
  Top 0.25: IC8.2 66.05,36.25 65.8,36.5 65.8,36.9 65.5,37.2 63.9,37.2 R25.2 v62.4,37.9 | SW4.2 59.3,27.9 59.6,28.2 59.6,32.3 59.3,32.6 59.3,33.3 59.6,33.6 62.1,33.6 v62.4,33.9
  Bottom 0.25: v62.4,37.9 v62.4,33.9
FB_BL
  Top 0.25: 25.9,37 25.9,38.2 25.5,38.6 22.9,38.6 R7.2 22.2,40.5 20.7,42 SW3.2 | 25.9,37 25.9,36.8 IC2.1 | 25.9,37 25.7,36.8 | 25.9,37 26.1,36.8
FB_BL1
  Top 0.25: 66.9,37 66.9,38.2 66.5,38.6 63.9,38.6 R23.2 63.2,40.5 61.7,42 SW6.2 | 66.9,37 66.9,36.8 IC8.1 | 66.9,37 66.7,36.8 | 66.9,37 67.1,36.8
FB_ISP
  Top 0.25: SW2.2 15.7,42 17.7,40 19.9,40 20.7,39.2 20.7,36.9 21.1,36.5 R8.2 22.9,35.8 24.9,35.8 24.95,35.75 IC2.3
FB_ISP1
  Top 0.25: SW5.2 56.7,42 58.7,40 60.9,40 61.7,39.2 61.7,36.9 62.1,36.5 R24.2 63.9,35.8 65.9,35.8 65.95,35.75 IC8.3
GND  (via drill 0.3, 0.3 pad 0.45)
  Top 0.25: Q2.4 19.35,35.05 18.8,35.6 17.8,36.2 17.25,36.75 Q2.2 | U1.6 25.8,54.33 25.5,54.33 | 25.8,53.7 25.9,53.8 | v29.5,35 IC2.EXP
  Top 0.4: v15.3,37.3 C9.2 | v17.5,38.4 18.4,38.4 | v28.1,41.1 C6.2 | 22.2,34.1 C5.2 | C7.2 v30.9,29.6 | v28.2,26.4 27.3,26.4 C10.2
  Top 0.406: v16.6,29.1 C4.2
  Bottom 0.4: C11.2 24.7,24.7 24.7,24.6
  other vias: 21.2,52.7 22.6,55.7 24.6,55.6 27.8,52.7 25.5,55.6 23.1,53.9 23.7,55.6 15.9,37.9 18.8,56.5 16.8,56.5 31.4,56.5 32.2,56.5 33.2,56.5 17.8,56.5 17.3,56 18.3,56 32.7,56 24,54.7 25,54.7 24,53.9 27.7,35 28.6,34.1 28.6,36 15.7,45 20.7,45 29.3,19.6 20.5,22.7 19,32.9 17.5,27 18.8,21.9 16.3,56 15.8,56.5 15.3,56 14.8,56.5 14.3,56 13.8,56.5 13.3,56 12.8,56.5 12.3,56 11.8,56.5 11.3,56 10.8,56.5 33.7,56 34.2,56.5 34.7,56 35.2,56.5 35.7,56 36.2,56.5 36.7,56 37.2,56.5 37.7,56 38.2,56.5 19.3,56 19.8,56.5 20.5,56.5 30.6,56.5 29.8,56.5 29.1,56.5 28.4,56.5 12.6,50.3 12.6,47.7 12.6,45.1 12.6,42.6 12.6,40.1 12.6,37.5 12.6,35 12.6,32.5 12.6,30 12.6,27.4 12.6,24.8 12.6,22.3 12.6,19.8 25.8,16.3
  pour Top (isolate 0.2, no thermals): 10,10 10,60 39,60 39,10
  pour Bottom (isolate 0.2): 10,10 10,60 39,60 39,10
GND1  (via drill 0.3, 0.3 pad 0.45)
  Top 0.25: Q4.4 60.35,35.05 59.8,35.6 58.8,36.2 58.25,36.75 Q4.2 | U2.6 66.8,54.33 66.5,54.33 | 66.8,53.7 66.9,53.8 | v70.5,35 IC8.EXP
  Top 0.4: v56.3,37.3 C18.2 | v58.5,38.4 59.4,38.4 | v69.1,41.1 C21.2 | 63.2,34.1 C20.2 | C22.2 v71.9,29.6 | v69.2,26.4 68.3,26.4 C23.2
  Top 0.406: v57.6,29.1 C19.2
  Bottom 0.4: C24.2 65.7,24.7 65.7,24.6
  other vias: 62.2,52.7 63.6,55.7 65.6,55.6 68.8,52.7 66.5,55.6 64.1,53.9 64.7,55.6 56.9,37.9 59.8,56.5 57.8,56.5 72.4,56.5 73.2,56.5 74.2,56.5 58.8,56.5 58.3,56 59.3,56 73.7,56 65,54.7 66,54.7 65,53.9 68.7,35 69.6,34.1 69.6,36 56.7,45 61.7,45 70.3,19.6 61.5,22.7 60,32.9 58.5,27 59.8,21.9 57.3,56 56.8,56.5 56.3,56 55.8,56.5 55.3,56 54.8,56.5 54.3,56 53.8,56.5 53.3,56 52.8,56.5 52.3,56 51.8,56.5 74.7,56 75.2,56.5 75.7,56 76.2,56.5 76.7,56 77.2,56.5 77.7,56 78.2,56.5 78.7,56 79.2,56.5 60.3,56 60.8,56.5 61.5,56.5 71.6,56.5 70.8,56.5 70.1,56.5 69.4,56.5 53.6,50.3 53.6,47.7 53.6,45.1 53.6,42.6 53.6,40.1 53.6,37.5 53.6,35 53.6,32.5 53.6,30 53.6,27.4 53.6,24.8 53.6,22.3 53.6,19.8 66.8,16.3
  pour Top (isolate 0.2, no thermals): 51,10 51,60 80,60 80,10
  pour Bottom (isolate 0.2): 51,10 51,60 80,60 80,10
N$2
  Top 0.25: U1.9 28.68,53.73 29.2,53.2 29.2,52.3 Q1.1
N$3
  Top 0.25: U1.10 27.48,54.38 27.5,54.4 29.5,54.4 Q1.2
N$4
  Top 0.25: IC2.9 26.85,31.95 R6.2 C13.1
N$5
  Top 0.25: U2.9 69.67,53.73 70.2,53.2 70.2,52.3 Q3.1
N$6
  Top 0.25: TR1.3 R10.1
N$7
  Top 0.25: IC2.15 29.85,31.55 32,29.4 32,24.5 TR1.1
N$8  (via drill 0.3)
  Top 0.25: IC2.7 25.25,33.75 25,33.5 25,33.1 24.5,32.6 21.7,32.6 v21.4,32.3 | R4.1 v13.8,23.8
  Bottom 0.25: v13.8,23.8 13.3,24.3 13.3,29.6 16,32.3 v21.4,32.3
N$9  (via drill 0.3)
  Top 0.25: IC2.10 27.35,31.85 27.3,31.8 27.3,31.2 24.8,28.7 v23.6,28.7 | v15.6,28.3 13.8,26.5 R5.1
  Bottom 0.25: v15.6,28.3 23.2,28.3 v23.6,28.7
N$10  (via drill 0.3)
  Top 0.25: IC2.11 27.85,31.65 27.7,31.5 27.7,30.9 24.8,28 v24.1,28 | R11.1 v15,26.7
  Bottom 0.25: v24.1,28 23.6,28 23.4,27.8 16.1,27.8 v15,26.7
N$11
  Top 0.25: LED1.1 14.6,15.4 15,15.8 R11.2
N$12
  Top 0.25: LED1.2 13.9,14 13.1,14.8 13.1,16 14.5,17.4 14.5,24 R5.2
N$13
  Top 0.25: LED1.3 13.8,12.6 12.6,13.8 12.6,16.2 13.8,17.4 R4.2
N$14
  Top 0.25: LED2.3 13.8,51 13,51.8 13,53.4 R18.1
N$15
  Top 0.25: LED2.2 14.6,52.4 15.4,53.2 R17.1
N$16
  Top 0.25: R16.1 12.7,55.1 14,53.8 LED2.1
N$17
  Top 0.25: U2.10 68.47,54.38 68.5,54.4 70.5,54.4 Q3.2
N$18
  Top 0.25: C8.1 19.45,38.35 Q2.1 19.65,36.75 21.2,35.2 24.9,35.2 24.95,35.25 IC2.4
N$19
  Top 0.25: C9.1 15.55,35.05 Q2.3 18.1,34.1 20.5,34.1 21.2,34.8 24.9,34.8 24.95,34.75 IC2.5
N$20
  Top 0.25: IC2.14 29.35,31.65 29.3,31.6 29.3,28.9 R3.2 C7.1
N$21
  Top 0.25: R3.1 29.3,26.9 29.3,26.1 | 29.3,26.1 29.3,21.1 24.4,16.2 24.4,15.6 24.5,15.5 CON1.3 | R10.2 29.3,26.1
N$22
  Top 0.25: CON1.2 23.85,15.55 23.9,15.6 23.9,16.4 28.9,21.4 28.9,26.9 R2.1
N$23
  Top 0.25: C17.1 60.45,38.35 Q4.1 60.65,36.75 62.2,35.2 65.9,35.2 65.95,35.25 IC8.4
N$24
  Top 0.25: IC2.13 28.85,31.65 28.9,31.6 28.9,28.9 R2.2 C10.1
N$25
  Top 0.25: C18.1 56.55,35.05 Q4.3 59.1,34.1 61.5,34.1 62.2,34.8 65.9,34.8 65.95,34.75 IC8.5
N$26
  Top 0.25: R21.1 70.3,26.9 70.3,26.1 | 70.3,26.1 70.3,21.1 65.4,16.2 65.4,15.6 65.5,15.5 CON2.3 | R26.2 70.3,26.1
N$27
  Top 0.25: CON2.2 64.85,15.55 64.9,15.6 64.9,16.4 69.9,21.4 69.9,26.9 R20.1
N$28
  Top 0.25: IC8.14 70.35,31.65 70.3,31.6 70.3,28.9 R21.2 C22.1
N$29
  Top 0.25: IC8.13 69.85,31.65 69.9,31.6 69.9,28.9 R20.2 C23.1
N$30
  Top 0.25: IC8.9 67.85,31.95 R22.2 C26.1
N$31
  Top 0.25: TR2.3 R26.1
N$32
  Top 0.25: IC8.15 70.85,31.55 73,29.4 73,24.5 TR2.1
N$33  (via drill 0.3)
  Top 0.25: IC8.7 66.25,33.75 66,33.5 66,33.1 65.5,32.6 62.7,32.6 v62.4,32.3 | R27.1 v54.8,23.8
  Bottom 0.25: v54.8,23.8 54.3,24.3 54.3,29.6 57,32.3 v62.4,32.3
N$34  (via drill 0.3)
  Top 0.25: IC8.10 68.35,31.85 68.3,31.8 68.3,31.2 65.8,28.7 v64.6,28.7 | v56.6,28.3 54.8,26.5 R28.1
  Bottom 0.25: v56.6,28.3 64.2,28.3 v64.6,28.7
N$35  (via drill 0.3)
  Top 0.25: IC8.11 68.85,31.65 68.7,31.5 68.7,30.9 65.8,28 v65.1,28 | R29.1 v56,26.7
  Bottom 0.25: v65.1,28 64.6,28 64.4,27.8 57.1,27.8 v56,26.7
N$36
  Top 0.25: LED3.2 54.9,14 54.1,14.8 54.1,16 55.5,17.4 55.5,24 R28.2
N$37
  Top 0.25: LED3.1 55.6,15.4 56,15.8 R29.2
N$38
  Top 0.25: LED3.3 54.8,12.6 53.6,13.8 53.6,16.2 54.8,17.4 R27.2
N$39
  Top 0.25: LED4.3 54.8,51 54,51.8 54,53.4 R36.1
N$40
  Top 0.25: LED4.2 55.6,52.4 56.4,53.2 R35.1
N$41
  Top 0.25: R34.1 53.7,55.1 55,53.8 LED4.1
NSRST
  Top 0.25: IC2.8 25.9,33.2 25.9,33 | 25.9,33 25.9,32.3 25.5,31.9 23,31.9 R1.2 21.2,31.2 | 25.9,33 25.7,33.2 | 25.9,33 26.1,33.2 | IC3.2 20,31.9 20.8,31.9 21,31.7 21,31.4 | IC3.1 20,31 20.8,31 21,31.2 | 21,31.4 21,31.2 | 21,31.2 21.2,31.2 | 21,31.4 21.2,31.2
NSRST1
  Top 0.25: IC8.8 66.9,33.2 66.9,33 | 66.9,33 66.9,32.3 66.5,31.9 64,31.9 R19.2 62.2,31.2 | 66.9,33 66.7,33.2 | 66.9,33 67.1,33.2 | IC9.2 61,31.9 61.8,31.9 62,31.7 62,31.4 | IC9.1 61,31 61.8,31 62,31.2 | 62,31.4 62,31.2 | 62,31.2 62.2,31.2 | 62,31.4 62.2,31.2
P0_1  (via drill 0.3)
  Top 0.25: IC8.27 70.35,38.45 71.4,39.5 v72.1,39.5
  Bottom 0.25: IC6.2 63.97,22.14 64.8,21.3 64.8,18.6 65.5,17.9 74.4,17.9 75.4,18.9 75.4,23.1 69.6,28.9 69.6,32.4 71.6,34.4 71.6,36.4 71.4,36.6 71.4,38.8 v72.1,39.5
P0_2  (via drill 0.3)
  Top 0.25: IC8.26 70.85,38.35 71.3,38.8 v72.8,38.8
  Bottom 0.25: IC6.5 57.5,19.5 59.9,19.5 62.5,16.9 74.8,16.9 76.4,18.5 76.4,23.5 70.5,29.4 70.5,31.9 72.6,34 72.6,36.6 72.4,36.8 72.4,37.5 72.8,37.9 v72.8,38.8
P0_3  (via drill 0.3)
  Top 0.25: IC8.25 71.4,37.7 71.4,38.1 71.5,38.2 v72.2,38.2
  Bottom 0.25: IC6.6 57.5,20.8 59.3,20.8 62.7,17.4 74.6,17.4 75.9,18.7 75.9,23.3 70,29.2 70,32.1 72.1,34.2 72.1,36.5 71.9,36.7 71.9,37.9 v72.2,38.2
P0_15  (via drill 0.3)
  Top 0.25: IC2.25 30.4,37.7 30.4,38.1 30.5,38.2 v31.2,38.2
  Bottom 0.25: IC4.6 16.5,20.8 18.3,20.8 21.7,17.4 33.6,17.4 34.9,18.7 34.9,23.3 29,29.2 29,32.1 31.1,34.2 31.1,36.5 30.9,36.7 30.9,37.9 v31.2,38.2
P0_16  (via drill 0.3)
  Top 0.25: IC2.26 29.85,38.35 30.3,38.8 v31.8,38.8
  Bottom 0.25: IC4.5 16.5,19.5 18.9,19.5 21.5,16.9 33.8,16.9 35.4,18.5 35.4,23.5 29.5,29.4 29.5,31.9 31.6,34 31.6,36.6 31.4,36.8 31.4,37.5 31.8,37.9 v31.8,38.8
P0_32  (via drill 0.3)
  Top 0.25: IC2.27 29.35,38.45 30.4,39.5 v31.1,39.5
  Bottom 0.25: IC4.2 22.96,22.14 23.8,21.3 23.8,18.6 24.5,17.9 33.4,17.9 34.4,18.9 34.4,23.1 28.6,28.9 28.6,32.4 30.6,34.4 30.6,36.4 30.4,36.6 30.4,38.8 v31.1,39.5
P1_1  (via drill 0.3)
  Top 0.25: IC8.28 69.85,38.55 v71.4,40.1
  Bottom 0.25: IC6.1 63.99,23.41 65.3,22.1 65.3,18.8 65.7,18.4 74.2,18.4 74.9,19.1 74.9,22.9 69.1,28.7 69.1,32.6 71.1,34.6 71.1,36.3 70.9,36.5 70.9,39.6 v71.4,40.1
P1_15  (via drill 0.3)
  Top 0.25: IC2.28 28.85,38.55 v30.4,40.1
  Bottom 0.25: IC4.1 23,23.41 24.3,22.1 24.3,18.8 24.7,18.4 33.2,18.4 33.9,19.1 33.9,22.9 28.1,28.7 28.1,32.6 30.1,34.6 30.1,36.3 29.9,36.5 29.9,39.6 v30.4,40.1
RESET  (via drill 0.3)
  Top 0.25: v14.1,44.6 14.1,34.6 15.3,33.4 17.35,33.4 IC3.4 | U1.25 20.93,53.73 v20.7,53.5
  Bottom 0.25: v14.1,44.6 14.1,50.8 16.8,53.5 v20.7,53.5
RESET1  (via drill 0.3)
  Top 0.25: v55.1,44.6 55.1,34.6 56.3,33.4 58.35,33.4 IC9.4 | U2.25 61.92,53.73 v61.7,53.5
  Bottom 0.25: v55.1,44.6 55.1,50.8 57.8,53.5 v61.7,53.5
SWCLK  (via drill 0.3)
  Top 0.25: U1.4 24.5,52.4 v24.7,52.2 | X1.1 35,20.7 35,24.2 34.1,25.1 34.1,30.8 32.6,32.3 32.6,36.1 | 32.6,36.1 32.6,36.3 | 32.6,36.3 32.6,36.5 | 32.6,36.5 32.6,37.4 32.4,37.6 32.4,39.1 29.5,42 R14.1 27.3,42.8 26,42.8 25.5,43.3 25.5,44.6 25.2,44.9 v25.2,45.7 | IC2.23 31.65,36.25 31.7,36.3 32.4,36.3 | 32.4,36.3 32.6,36.3 | 32.4,36.3 32.6,36.5 | 32.4,36.3 32.6,36.1
  Bottom 0.25: v24.7,52.2 24.7,48.9 25.5,48.1 25.5,46 v25.2,45.7
SWCLK1  (via drill 0.3)
  Top 0.25: U2.4 65.5,52.4 v65.7,52.2 | X3.1 76,20.7 76,24.2 75.1,25.1 75.1,30.8 73.6,32.3 73.6,36.1 | 73.6,36.1 73.6,36.3 | 73.6,36.3 73.6,36.5 | 73.6,36.5 73.6,37.4 73.4,37.6 73.4,39.1 70.5,42 R32.1 68.3,42.8 67,42.8 66.5,43.3 66.5,44.6 66.2,44.9 v66.2,45.7 | IC8.23 72.65,36.25 72.7,36.3 73.4,36.3 | 73.4,36.3 73.6,36.3 | 73.4,36.3 73.6,36.5 | 73.4,36.3 73.6,36.1
  Bottom 0.25: v65.7,52.2 65.7,48.9 66.5,48.1 66.5,46 v66.2,45.7
SWDIO  (via drill 0.3)
  Top 0.25: U1.5 25.15,53.65 v25.1,53.7 | 37.2,21.1 X1.2 37.17,21.03 35.7,22.5 35.7,24.3 34.6,25.4 34.6,31 33.1,32.5 33.1,38 v33,38.1 33,39.2 28.6,43.6 R15.1 27,44.7 26.3,44.7 v26,45 | IC2.24 31.65,36.75 v32,37.1
  Bottom 0.25: v25.1,53.7 25.3,53.5 25.3,49 26,48.3 v26,45 | v32,37.1 v33,38.1
SWDIO1  (via drill 0.3)
  Top 0.25: U2.5 66.15,53.65 v66.1,53.7 | 78.2,21.1 X3.2 78.17,21.03 76.7,22.5 76.7,24.3 75.6,25.4 75.6,31 74.1,32.5 74.1,38 v74,38.1 74,39.2 69.6,43.6 R33.1 68,44.7 67.3,44.7 v67,45 | IC8.24 72.65,36.75 v73,37.1
  Bottom 0.25: v66.1,53.7 66.3,53.5 66.3,49 67,48.3 v67,45 | v73,37.1 v74,38.1
TGT_RX
  Top 0.25: IC2.32 26.85,38.45 23.6,41.7 R13.1 R13.2
TGT_RX1
  Top 0.25: IC8.32 67.85,38.45 64.6,41.7 R31.1 R31.2
TGT_TX
  Top 0.25: IC2.31 27.35,38.65 24.8,41.2 R12.1 R12.2
TGT_TX1
  Top 0.25: IC8.31 68.35,38.65 65.8,41.2 R30.1 R30.2
VPP  (via drill 0.3)
  Top 0.25: U1.31 26.35,55.35 v26.5,55.5
  Bottom 0.25: v26.5,55.5 31.8,55.5 35.8,51.5 37,51.5 37.01,51.51 X1.14
VPP2  (via drill 0.3)
  Top 0.25: U2.31 67.35,55.35 v67.5,55.5
  Bottom 0.25: v67.5,55.5 72.8,55.5 76.8,51.5 78,51.5 78.01,51.51 X3.14
VUSB
  Top 0.4: CON1.1 23.2,16.6 | IC1.3 23.8,21.5 | 23.8,21.5 C1.1 | IC1.2 23,21.7 23.2,21.5 | 23.2,21.5 23.4,21.3 | 23.4,21.3 C1.1 | IC1.4 24.6,21.7 24.4,21.5 | 24.4,21.5 24.2,21.3 | 24.2,21.3 C1.1 | 23.2,21.5 23.8,21.5 | 23.8,21.5 24.4,21.5 | 23.2,16.6 23.6,17 | 23.6,17 23.8,17.2 | 23.8,17.2 24,17.4 24,17.8 23.6,17.8 23.6,17 | 23.4,21.3 23.4,20.9 | 24.2,21.3 24.2,20.9 | 23.2,16.6 23.2,17.2 | 23.2,17.2 23.2,17.8 | 23.2,17.2 23.8,17.2
  Top 1.2: C1.1 23.8,19.1 23.6,18.8 23.6,17.8
VUSB1
  Top 0.4: CON2.1 64.2,16.6 | IC10.3 64.8,21.5 | 64.8,21.5 C15.1 | IC10.2 64,21.7 64.2,21.5 | 64.2,21.5 64.4,21.3 | 64.4,21.3 C15.1 | IC10.4 65.6,21.7 65.4,21.5 | 65.4,21.5 65.2,21.3 | 65.2,21.3 C15.1 | 64.2,21.5 64.8,21.5 | 64.8,21.5 65.4,21.5 | 64.2,16.6 64.6,17 | 64.6,17 64.8,17.2 | 64.8,17.2 65,17.4 65,17.8 64.6,17.8 64.6,17 | 64.4,21.3 64.4,20.9 | 65.2,21.3 65.2,20.9 | 64.2,16.6 64.2,17.2 | 64.2,17.2 64.2,17.8 | 64.2,17.2 64.8,17.2
  Top 1.2: C15.1 64.8,19.1 64.6,18.8 64.6,17.8

## Text on the board
Bottom: @_K4ZUKI_ | @_K4ZUKI_
tPlace: VPP | VPP | ISP | GND | ISP | GND | TARGET | TARGET | 1.1 | 1.1 | 0.2 | 0.2 | 0.3 | 0.3 | 0.6 | 0.6 | 0.7 | 0.7 | 0.5 | 0.5 | 0.4 | 0.4 | 0.1 | 0.1 | 0.0 | 0.0 | 1.0 | 1.0 | SWDIO | SWDIO | RESET | RESET | 3.3V | SWCLK | 3.3V | SWCLK
bPlace: muRata LBCA2HNZYZ / BLE module breakout | muRata LBCA2HNZYZ / BLE module breakout
Vscore: V-CUT | V-CUT | V-CUT | V-CUT | V-CUT | V-CUT
_tPlace: U1
_tNames: R16 | R17 | R16 | R17 | R18 | R18 | U1 | U1 | LED2 | LED2 | X1 | X1 | C2 | Q1 | C2 | Q1 | R13 | R13 | R15 | R15 | SW3 | SW3 | R14 | R14 | SW2 | R12 | SW2 | R12 | C8 | C6 | C8 | C6 | Q2 | R7 | Q2 | R7 | R9 | R9 | R8 | R8 | X2 | IC2 | X2 | IC2 | C9 | C5 | C9 | C5 | IC3 | R1 | R6 | IC3 | R1 | R6 | C4 | C13 | C10 | R2 | R3 | C7 | C4 | C13 | C10 | R2 | R3 | C7 | C3 | C3 | R5 | SW1 | R5 | SW1 | R10 | R10 | R11 | TR1 | R11 | TR1 | IC1 | IC1 | R4 | C1 | R4 | C1 | CON1 | CON1 | LED1 | LED1
_bNames: C12 | C11 | C12 | C11 | IC4 | IC5 | IC4 | IC5